# Altium PCB MotorDriver_Experimental.PcbDoc
Units mil, origin at the board's own origin, x right, y up, seen from the top; angles counter-clockwise.
Board outline 2220 x 2620 mil, 2 copper layers (Top Layer, Bottom Layer); 72 components, 43 nets, 255 pads, 79 vias.
Unrouted connection lines stored in the file: 69.
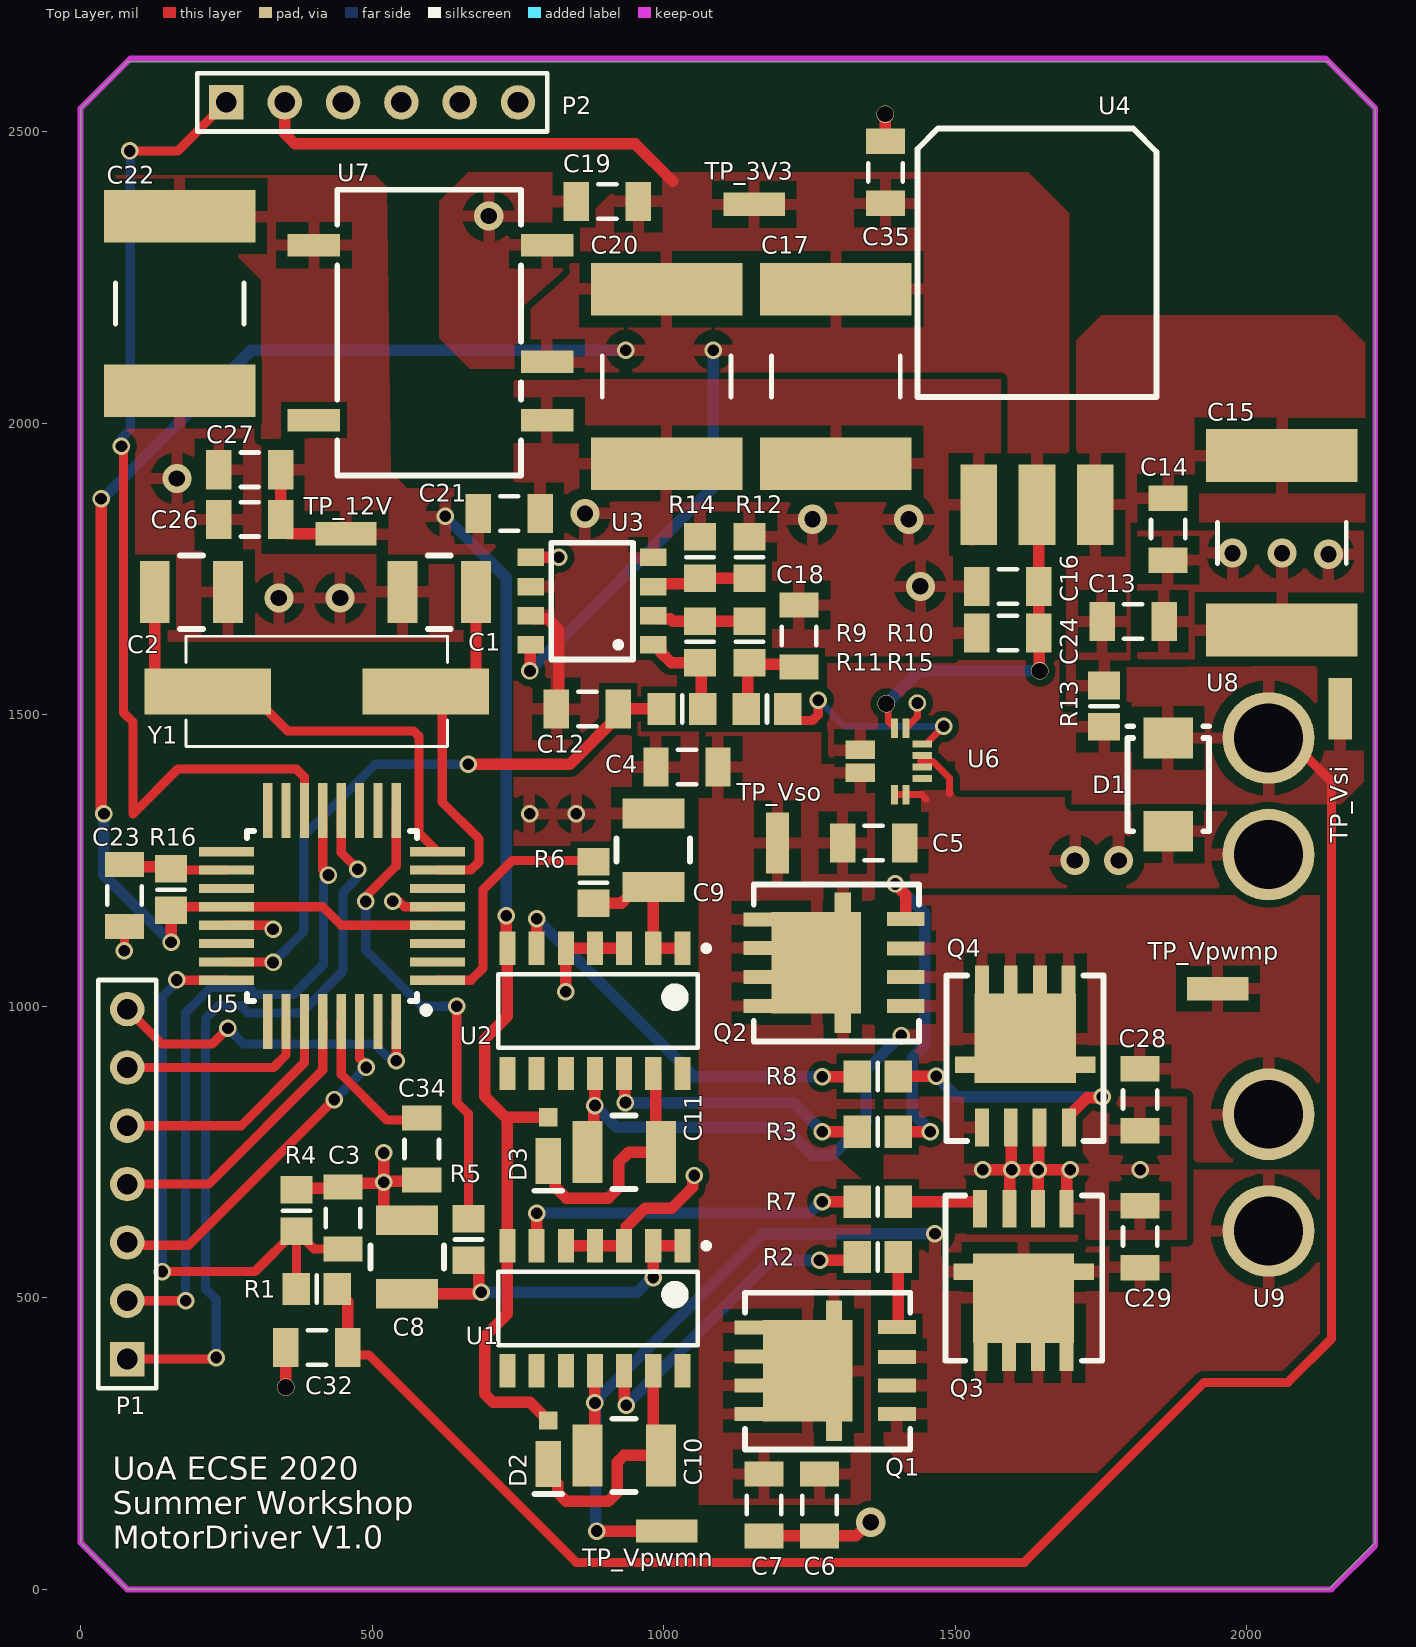
[diagram p0: Top Layer view]
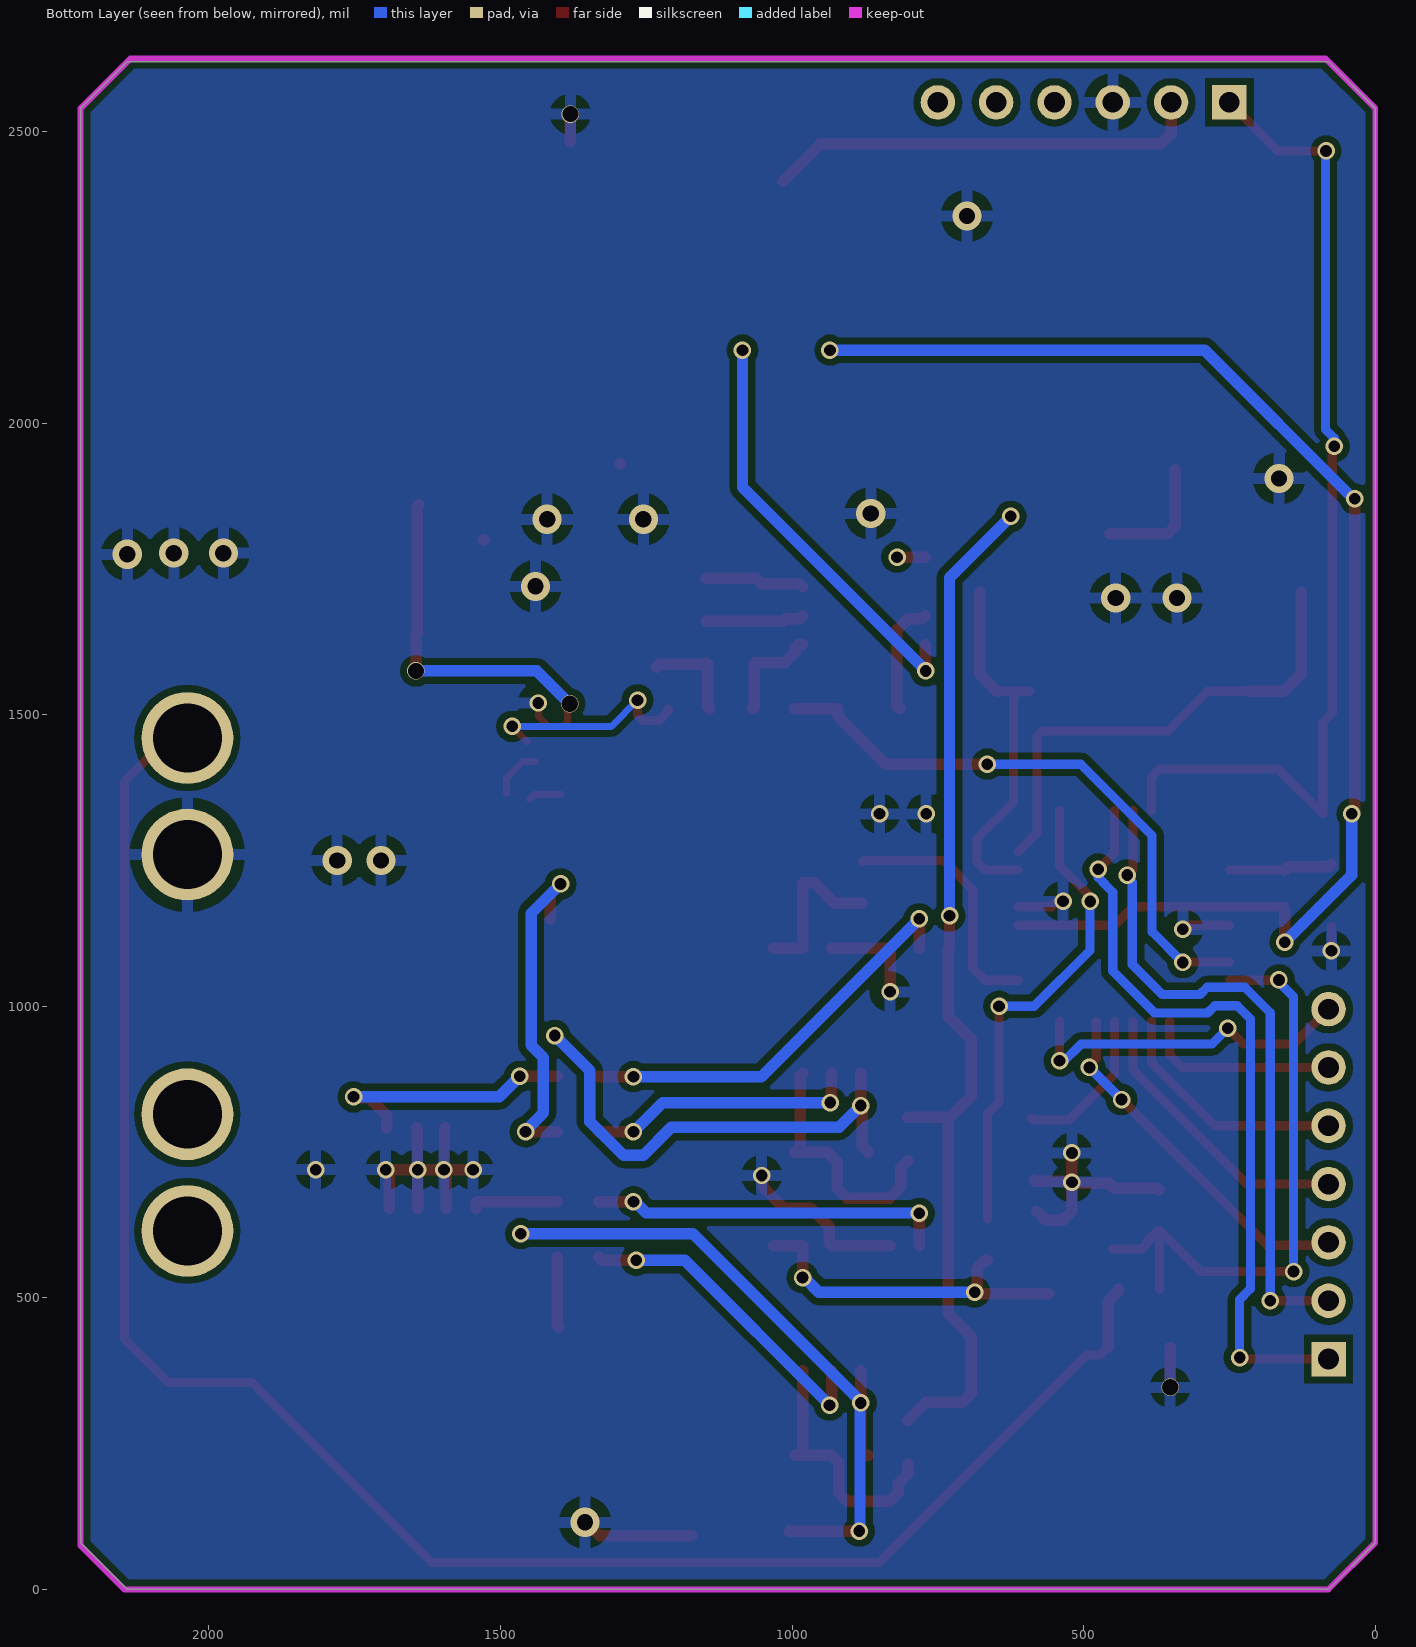
[diagram p1: Bottom Layer view, seen from below]
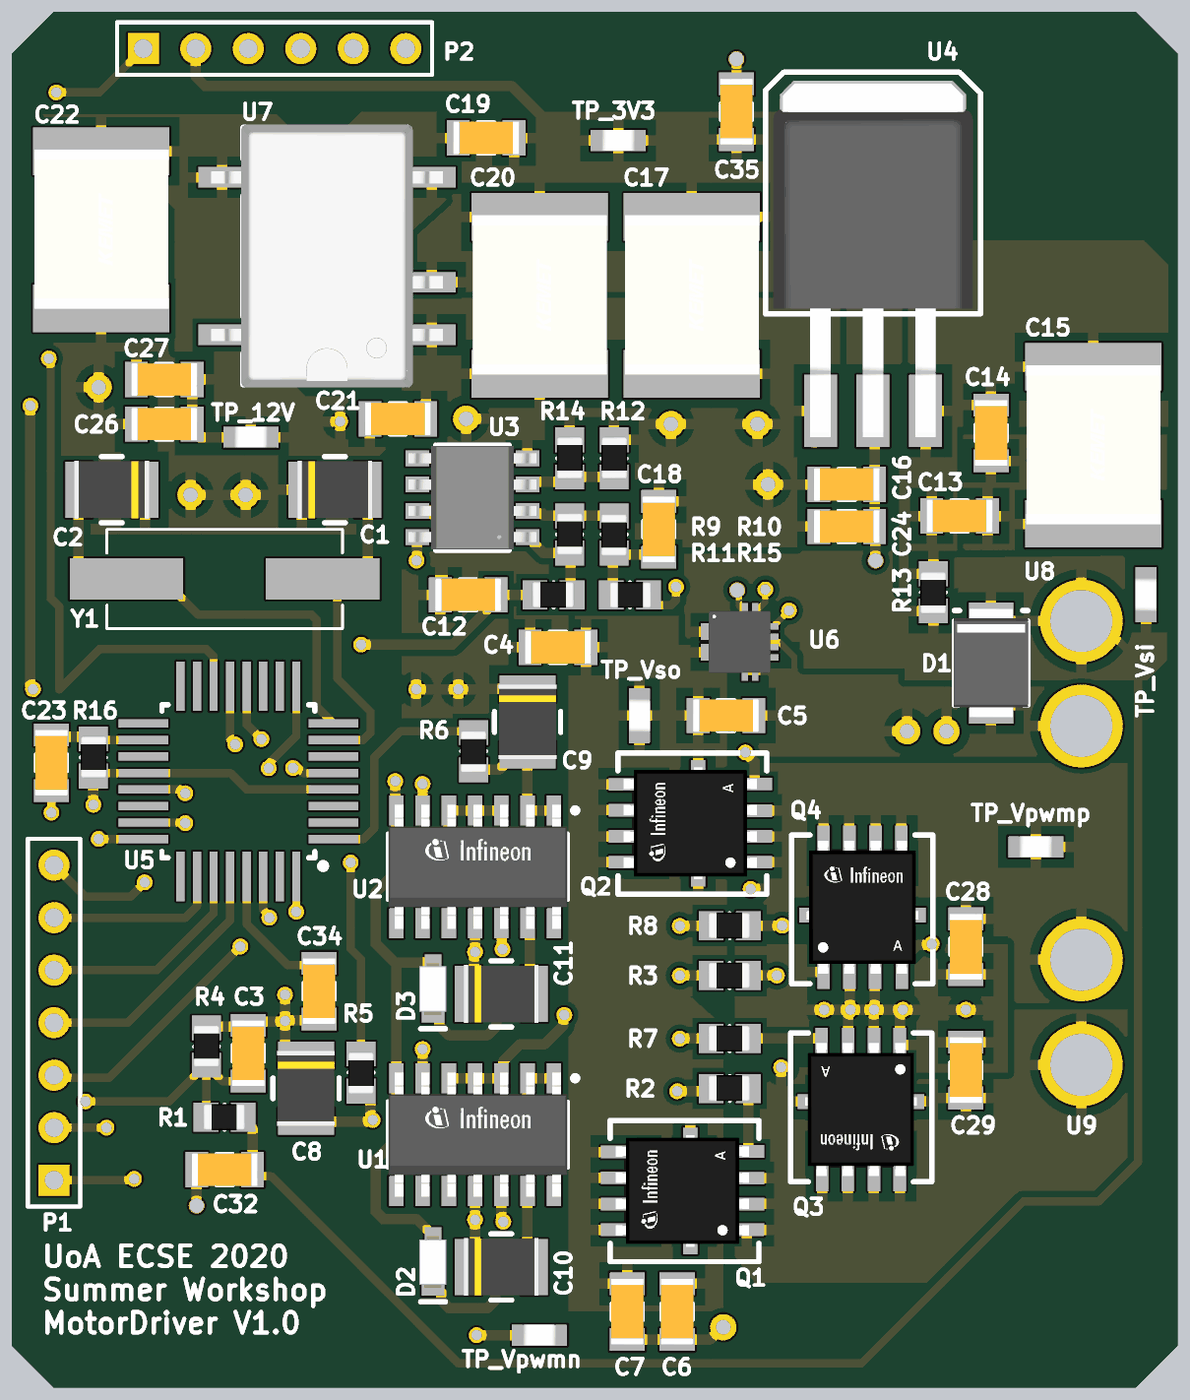
[diagram p2: 3D render of the assembled board from above, using the file's embedded part models]

## Layer stack, top to bottom
Top Solder: solder mask 0.4, Solder Resist, Dk 3.5
Top Layer: signal copper 1.4
Dielectric 1: dielectric 12.6, FR-4, Dk 4.8
Bottom Layer: signal copper 1.4
Bottom Solder: solder mask 0.4, Solder Resist, Dk 3.5

## Board outline
0,2540 80,2620 2140,2620 2220,2540 2220,80 2140,0 80,0 0,80

## Design rules (kind name [scope] priority, off if disabled: settings)
BoardOutlineClearance [All] p1: gap=10 ignorepadtopadclearanceinfootprint=FALSE except(0: Arc-SplitContinuation Track-SplitContinuation SMDPad-SplitContinuation THPad-SplitContinuation Via-SplitContinuation Fill-SplitContinuation Poly-SplitContinuation Region-SplitContinuation Text-SplitContinuation)
Clearance [All] p1: gap=11.81 ignorepadtopadclearanceinfootprint=TRUE
Height [All] p1: minheight=0 maxheight=3937.01 prefheight=500
HoleSize [All] p1: absolutevalues=TRUE maxlimit=393.7 minlimit=19.68 maxpercent=80.000 minpercent=20.000
PolygonConnect [All] p1: connectstyle=Relief reliefconductorwidth=19.68 reliefentries=4 polygonreliefangle="90 Angle" airgapwidth=19.68
RoutingVias [All] p1: holewidth=28 width=50 viastyle="Through Hole" minholewidth=28 minwidth=50 maxholewidth=28 maxwidth=50
SilkToSilkClearance [All] p1: silktosilkclearance=3.94
SilkToSolderMaskClearance [IsPad] p1: minsilkscreentomaskgap=3.94 clearancetoexposedcopper=TRUE
SolderMaskExpansion [All] p1: expansion=4 istentingtop=FALSE
Width [All] p1: maxlimit=39.37 minlimit=11.81 preferedwidth=19.68
26 further rules are at their usual default settings.

## Components (designator, comment, footprint, x,y, rotation, side; value= is the part's Value field where it differs from the comment)
C1 "Cap CER" C1210 615,1710 r0 top value=2200nF/100V
C2 "Cap CER" C1210 190,1710 r180 top value=2200nF/100V
C3 "Cap CER" C1206 450,636.85 r270 top value=100nF/100V
C4 "Cap CER" C1206 1040,1410 r0 top value=100nF/100V
C5 "Cap CER" C1206 1360,1280 r180 top value=100nF/100V
C6 "Cap CER" C1206 1267,144.74 r90 top value=100nF/100V
C7 "Cap CER" C1206 1172,144.74 r90 top value=100nF/100V
C8 "Cap CER" C1210 560,570 r270 top value=2200nF/100V
C9 "Cap CER" C1210 982,1267.73 r270 top value=2200nF/100V
C10 "Cap CER" C1210 932,229.74 r0 top value=2200nF/100V
C11 "Cap CER" C1210 932,749.74 r0 top value=2200nF/100V
C12 "Cap CER" C1206 868.85,1509.74 r0 top value=100nF/100V
C13 "CER 6.8nF" C1206 1805,1660 r180 top value=100nF/100V
C14 "CER 100nF" C1206 1865,1818.15 r90 top value=100nF/100V
C15 "FILM 10uF" LDECE4150KA0N00 2059.84,1794.61 r90 top value=1.5uF/50V
C16 "CER 100nF" C1206 1590,1720 r0 top value=100nF/100V
C17 "FILM 10uF" LDECE4150KA0N00 1295,2080 r90 top value=1.5uF/50V
C18 "Cap CER" C1206 1232,1634.74 r270 top value=100nF/100V
C19 "CER 100nF" C1206 903.15,2380 r0 top value=100nF/100V
C20 "FILM 10uF" LDECE4150KA0N00 1005,2080 r90 top value=1.5uF/50V
C21 "CER 100nF" C1206 735,1845 r180 top value=100nF/100V
C22 "FILM 2.2uF" LDECE4150KA0N00 170,2205 r90 top value=1.5uF/50V
C23 "Cap CER" C1206 75,1190 r90 top value=100nF/100V
C24 "CER 100nF" C1206 1590,1640 r0 top value=100nF/100V
C26 "CER 100nF" C1206 290,1835 r0 top value=100nF/100V
C27 "CER 100nF" C1206 290,1920 r0 top value=100nF/100V
C28 "CER 100nF" C1206 1817,839.74 r90 top value=100nF/100V
C29 "CER 100nF" C1206 1817,604.74 r270 top value=100nF/100V
C32 "CER 100nF" C1206 405,415 r0 top value=100nF/100V
C34 "CER 100nF" C1206 585,755 r90 top value=100nF/100V
C35 "Cap CER" C1206 1380,2430 r90 top value=100nF/100V
D1 "DO-214AA SMB" DO-214AA 1865,1380 r270 top
D2 "MSS1P6-M3/89A" "MicroSMP (DO-219AD)" 802,252.14 r90 top
D3 "MSS1P6-M3/89A" "MicroSMP (DO-219AD)" 802,772.14 r90 top
P1 "Header 7" HDR1X7 80,395 r90 top
P2 "Header 6" HDR1X6 250,2550 r0 top
Q1 "NMOS" BSC072N08NS5ATMA1_modified_v2 1277,374.74 r90 top
Q2 "NMOS" BSC072N08NS5ATMA1_modified_v2 1292,1074.74 r90 top
Q3 "NMOS" BSC072N08NS5ATMA1_modified_v2 1617,529.74 r180 top
Q4 "NMOS" BSC072N08NS5ATMA1_modified_v2 1620,914.74 r0 top
R1 "Resistor 0805" R0805 405,515 r0 top value=?
R2 "Resistor 0805" R0805 1367,569.74 r0 top value=?
R3 "Resistor 0805" R0805 1367,784.74 r0 top value=?
R4 "Resistor 0805" R0805 370,649.57 r270 top value=?
R5 "Resistor 0805" R0805 665,600 r90 top value=?
R6 "Resistor 0805" R0805 879.28,1212.02 r90 top value=?
R7 "Resistor 0805" R0805 1367,664.74 r0 top value=?
R8 "Resistor 0805" R0805 1367,879.74 r0 top value=?
R9 "Resistor 0805" R0805 1062,1624.74 r270 top value=?
R10 "Resistor 0805" R0805 1147,1624.74 r90 top value=?
R11 "Resistor 0805" R0805 1031.57,1509.74 r0 top value=?
R12 "Resistor 0805" R0805 1147,1769.74 r270 top value=?
R13 "Resistor 0805" R0805 1755,1514.57 r90 top value=?
R14 "Resistor 0805" R0805 1062,1769.74 r270 top value=?
R15 "Resistor 0805" R0805 1177,1509.74 r180 top value=?
R16 "Resistor 0805" R0805 155,1200 r270 top value=?
TP_3V3 "TP_3V3" TP5015 1155,2375 r180 top
TP_12V "TP_12V" TP5015 455,1810 r180 top
TP_Vpwmn "TP_Vsi" TP5015 1005,100 r180 top
TP_Vpwmp "TP_Vi_amp" TP5015 1950,1030 r180 top
TP_Vsi "TP_Vsi" TP5015 2160,1510 r270 top
TP_Vso "TP_Vso" TP5015 1195,1280 r90 top
U1 "IRS21834SPBF" SOIC127P600X175-14N 882,482.02 r270 top
U2 "IRS21834SPBF" SOIC127P600X175-14N 882,992.02 r270 top
U3 "LT6221IS8#PBF" SOIC8_NARROW 877,1694.74 r180 top
U4 "LD1086D2M" D2PAK-3L 1640,2210 r0 top
U5 "ATMega328PB" TQFP32 431.1,1154.76 r180 top
U6 "ACS70331EESATR-005U3" ACS70331_12QFN 1390,1420 r0 top
U7 "ISE0312A" ISE0312A 610,2155 r180 top
U8 "2 PIN HEADER 3MM" 3mm_holes 2037,1360 r270 top
U9 "2 PIN HEADER 3MM" 3mm_holes 2037,714.74 r270 top
Y1 "ECS-80-18-5PX-TR" XTAL_ECS-80-18-5PX-TR 405,1540 r180 top

## Footprints (in the part's own frame and the unit in brackets; to place one, negate y for a bottom-side part, rotate by r counter-clockwise, add the part's x,y. Pads: shape width x height; smd on the part's side, far side on the other; paste and mask are expansions set on the pad)
3mm_holes [mm]
  round 4 hole 3: 1(-2.54,0) 2(2.54,0)
ACS70331_12QFN [mm] "HIGH SENSITIVITY, 1 MHZ, GMR-BAS"
  rect 1.27x0.8 smd: 1(-1.35,0.5) 2(-1.35,-0.5)
  rect 0.3x0.85 smd: 5(0.15,-1.45) 6(0.65,-1.45) 11(0.65,1.45) 12(0.15,1.45)
  rect 0.85x0.3 smd: 7(1.35,-0.75) 8(1.35,-0.25) 9(1.35,0.25) 10(1.35,0.75)
  body extent -1.6,-1.5 1.4,1.5, height 0.75
BSC072N08NS5ATMA1_modified_v2 [mil]
  rect 23.94x65 smd: 1(-74,-123) 1(-25,-123) 1(24,-123) 4(75,-123) 8(-74,123) 8(-25,123) 8(25,123) 8(74,123)
  rect 65x27.87 smd: 8(-88,-15) 8(88,-15)
  rect 173.62x153.54 smd: 8(0,30.26)
  silkscreen extent -135,-146 134,138, body extent -106,-127 107,127, height 40
C1206 [mm] "Chip Capacitor, Body 3.2x1.6mm, IPC High Density"
  rect 1.1x1.7 smd: 1(-1.35,0) 2(1.35,0)
  silkscreen extent -0.4,-0.75 0.4,0.75, body extent -1.6,-0.8 1.6,0.8, height 1.5
C1210 [mm]
  rect 1.3x2.7 smd: 1(-1.6,0) 2(1.6,0)
  silkscreen extent -0.5,-1.6 0.5,1.6, body extent -1.8,-1.4 1.8,1.4, height 1.24
D2PAK-3L [mil]
  rect 63x137.8 smd: 1(100,-350) 2(0,-350) 3(-100,-350)
  silkscreen extent -205,-165 205,295, body extent -190,-400 190,279, height 200
DO-214AA [mil]
  rect 70x85 smd: 1(-80,0) 2(80,0)
  silkscreen extent -100,-70 80,70, body extent -104,-71 104,71, height 87
HDR1X6 [mm] "Connector; Header; 6 Position"
  rect 1.5x1.5 hole 0.9: 1(0,0)
  round 1.5 hole 0.9: 2(2.54,0) 3(5.08,0) 4(7.62,0) 5(10.16,0) 6(12.7,0)
  silkscreen extent -1.27,-1.27 13.97,1.27
HDR1X7 [mm] "Connector; Header; 7 Position"
  rect 1.5x1.5 hole 0.9: 1(0,0)
  round 1.5 hole 0.9: 2(2.54,0) 3(5.08,0) 4(7.62,0) 5(10.16,0) 6(12.7,0) 7(15.24,0)
  silkscreen extent -1.27,-1.27 16.51,1.27
ISE0312A [mil] "8-SMD model; 5 leads"
  rect 90x39 smd: 1(-190,150) 2(-190,50) 4(-190,-150) 5(210,-150) 8(210,150)
  silkscreen extent -145,-245 170,245, body extent -210,-250 230,250, height 285
LDECE4150KA0N00 [mm]
  rect 2.3x6.6 smd: 1(-3.8,0) 2(3.8,0)
  silkscreen extent -0.9,-2.8 0.9,2.8, body extent -3.82,-3.26 3.88,3.24, height 4.29
"MicroSMP (DO-219AD)" [mm]
  rect 0.8x0.8 smd: 1(0.95,0)
  rect 2x1.1 smd: 2(-0.95,0)
  silkscreen extent -2.25,-0.6 -2.25,0.6, body extent -1.58,-0.64 0.92,0.66, height 0.66
R0805 [mm]
  rect 1.2x1.4 smd: 1(-0.9,0) 2(0.9,0)
  silkscreen extent 0,-0.6 0,0.6, body extent -1.04,-0.63 0.99,0.64, height 0.6
SOIC8_NARROW [mil]
  rect 45x30 smd: 1(-105,75) 2(-105,25) 3(-105,-25) 4(-105,-75) 5(105,-75) 6(105,-25) 7(105,25) 8(105,75)
  silkscreen extent -70,-100 70,100, body extent -122,-98 122,99, height 69
SOIC127P600X175-14N [mm] "SOIC, 14-Leads, Body 8.65x3.90mm, Pitch 1.27mm, IPC Medium Density"
  rect 1.45x0.7 smd: 1(-2.725,3.81) 2(-2.725,2.54) 3(-2.725,1.27) 4(-2.725,0) 5(-2.725,-1.27) 6(-2.725,-2.54) 7(-2.725,-3.81) 8(2.725,-3.81) 9(2.725,-2.54) 10(2.725,-1.27) 11(2.725,0) 12(2.725,1.27) 13(2.725,2.54) 14(2.725,3.81)
  silkscreen extent -2.85,-4.22 1.6,4.97, body extent -3,-4.19 3,4.46, height 1.56
TP5015 [mil]
  rect 105x40 smd: 1(0,0)
  body extent -51,-20 51,19, height 59
TQFP32 [mm]
  rect 2.4x0.4 smd: 1(-4.6,2.8) 2(-4.6,2) 3(-4.6,1.2) 4(-4.6,0.4) 5(-4.6,-0.4) 6(-4.6,-1.2) 7(-4.6,-2) 8(-4.6,-2.8) 17(4.6,-2.8) 18(4.6,-2) 19(4.6,-1.2) 20(4.6,-0.4) 21(4.6,0.4) 22(4.6,1.2) 23(4.6,2) 24(4.6,2.8)
  rect 0.4x2.4 smd: 9(-2.8,-4.6) 10(-2,-4.6) 11(-1.2,-4.6) 12(-0.4,-4.6) 13(0.4,-4.6) 14(1.2,-4.6) 15(2,-4.6) 16(2.8,-4.6) 25(2.8,4.6) 26(2,4.6) 27(1.2,4.6) 28(0.4,4.6) 29(-0.4,4.6) 30(-1.2,4.6) 31(-2,4.6) 32(-2.8,4.6)
  silkscreen extent -4.24,-3.7 3.7,4.24, body extent -3.5,-3.5 3.5,3.5, height 1.3
XTAL_ECS-80-18-5PX-TR [mm]
  rect 5.5x2 smd: 1(-4.75,0) 2(4.75,0)
  silkscreen extent -5.7,-2.4 5.7,2.4, body extent -6.6,-2.41 6.6,2.41, height 4.32

## Part data
C1 C2 C8 C9 C10 C11: library part "Cap CER HF DC-Link CL32B225KCJSNNE", "CAP CER 2.2UF 100V X7R 1210", Manufacturer="AVX Corporation", MPN=CL32B225KCJSNNE, Supplier Part Number 1=1276-3362-1-ND, Part Description="CAP CER 2.2UF 100V X7R 1210", Supplier 1=Digi-Key, Supplier 2=Arrow, Supplier Part Number 2=CL32B225KCJSNNE, Type="Surface mount"
C3 C4 C5 C6 C7 C12 C13 C14 C16 C18 C19 C21 C23 C24 C26 C27 C28 C29 C32 C34 C35: library part "Cap CER Decoup C3216C0G2A104J160AC", "CAP CER 0.1UF 100V C0G 1206", Manufacturer="TDK Corporation", MPN=C3216C0G2A104J160AC, Supplier Part Number 1=1795799, Part Description="CAP CER 0.1UF 100V C0G 1206", Supplier 1=RSComponents, Supplier 2=Element14, Supplier 3=Digi-Key, Supplier 4=Mouser, Supplier Part Number 2=2906828, Supplier Part Number 3=445-172677-1-ND, Supplier Part Number 4=810-C3216C0G2A104J6C, Type="Surface mount"
C15 C17 C20 C22: library part "Cap Film SMD LDECE4150KA0N00", "CAP FILM 1.5UF 10% 50VDC 2824", Manufacturer=KEMET, MPN=LDECE4150KA0N00, Supplier Part Number 1=2495712, Part Description="CAP FILM 1.5UF 10% 50VDC 2824", Supplier 1=Element14, Supplier 2=RSComponents, Supplier 3=Digi-Key, Supplier 4=Mouser, Supplier Part Number 2=1650342, Supplier Part Number 3=399-12858-1-ND, Supplier Part Number 4=80-LDECE4150KA0N00, Type="Surface mount"
D1: library part SMBJ5351B-TP, "14V zener diode"
D2 D3: library part "Diode MSS1P6-M3/89A", "DIODE SCHOTTKY 60V 1A MICROSMP", Manufacturer="Vishay Semiconductor Diodes Division", Supplier Part Number 1=7103070P, MPN=MSS1P6-M3/89A, Part Description="DIODE SCHOTTKY 60V 1A MICROSMP", Supplier 1=RSComponents, Supplier 2=Element14, Supplier Part Number 2=2335157, Type="Surface mount"
P1: "Header, 7-Pin", LatestRevisionDate=17-Jul-2002, LatestRevisionNote="Re-released for DXP Platform.", Publisher="Altium Limited"
P2: "Header, 6-Pin", LatestRevisionDate=17-Jul-2002, LatestRevisionNote="Re-released for DXP Platform.", Publisher="Altium Limited"
Q1 Q2 Q3 Q4: library part "NMOS OptiMOS BSC072N08NS5ATMA1", "MOSFET N-CH 80V 74A 8TDSON", Manufacturer="Infineon Technologies", MPN=BSC072N08NS5ATMA1, Supplier Part Number 1=2725812, Part Description="MOSFET N-CH 80V 74A 8TDSON", Supplier 1=Element14, Supplier 2=Digi-Key, Supplier 3=Mouser, Supplier Part Number 2=BSC072N08NS5ATMA1CT-ND, Supplier Part Number 3=726-BSC072N08NS5ATMA, Type="Surface mount"
R1 R2 R3 R4 R5 R6 R7 R8 R9 R10 R11 R12 R13 R14 R15 R16: library part RES0805, "RES0805", MPN=?, Part Description=?, Type="Surface Mount"
TP_3V3 TP_12V TP_Vpwmn TP_Vpwmp TP_Vsi TP_Vso: library part TP_5015, "SM Test Point 5015"
U1 U2: "IC GATE DRVR HALF-BRIDGE 14SOIC"
U4: library part LD1086D2M33TR, "3.3V linear voltage regulator"
U5: "IC MCU 8BIT 32KB FLASH 32TQFP", Supplier Part Number 1=ATMEGA328PB-AU-ND, Supplier 1=Digi-Key, Supplier 2=Digikey, Supplier Part Number 2=ATMEGA328PB-AU-ND
U6: library part ACS70331_QFN, "HIGH SENSITIVITY, 1 MHZ, GMR-BAS"
U7: library part ISE0312A_8-SMD_5L, "3V-12V DC DC converter"
U8 U9: library part HEADER_2PIN, "3MM HOLES"
Y1: "8MHz Â±30ppm Crystal 18pF 60 Ohms HC-49/US", Package="HC49/US ECS International", Digi-Key_Part_Number=XC1271CT-ND, Digi-Key_Purchase_URL=https://www.digikey.com/product-detail/en/ecs-inc/ECS-80-18-5PX-TR/XC1271CT-ND/827735?utm_source=snapeda&utm_medium=aggregator&utm_campaign=symbol, MF="ECS Inc.", MP=ECS-80-18-5PX-TR, SnapEDA_Link=https://www.snapeda.com/parts/ECS-80-18-5PX-TR/ECS%20Inc./view-part/470513/?ref=snap

## Via types
v1: diameter 30, hole 20, Top Layer to Bottom Layer, 61 vias
v2: diameter 50, hole 28, Top Layer to Bottom Layer, 14 vias
v3: diameter 30, hole 28, Top Layer to Bottom Layer, 4 vias

## Nets (pads, with @x,y where several pads share a name; then routed paths per layer and width w, separated by ;. In a path a pad name is that pad's centre, name@x,y a point inside that pad or via, vN(x,y) a via of type N, cw(c..) or ccw(c..) an arc to the next point about the centre after c; other vN are vias at no path point)
3V3: C16.2 C17.2 C19.2 C20.2 C24.2 C35.1 P2.2 R16.2 TP_3V3.1 U3.8 U4.2 U5.4 U5.20 U6.12 U7.2 | length 4439.1
  Top Layer w11.81: v3(1381.46,1518.5) 1384.94,1515.02 1384.94,1488.05 U6.12@1391.5,1481.5
  Top Layer w15.75: R16.2 155,1170.51 U5.20 415.35,1170.51 446.85,1139.02 U5.4
  Top Layer w19.68: v1(35,1870) 35,1335 v1(40,1330) ; v1(155,1110) R16.2 ; P2.2 350,2496.53 367.8,2478.73 951.27,2478.73 1015,2415 ; v1(770.59,1575) 771.3,1575.7 771.3,1619.03 U3.8 ; U4.2 1643.15,1856.85 C16.2 C24.2 1644.07,1639.07 1644.07,1575.93 v3(1645,1575)
  Bottom Layer w19.68: v1(35,1870) 37.4,1870 292.4,2125 v1(935,2125) ; v1(40,1330) 40,1225 v1(155,1110) ; v1(770.59,1575) 770.59,1575.59 1085,1890 v1(1085,2125) ; v3(1381.46,1518.5) 1437.96,1575 v3(1645,1575)
12V: C21.2 C22.2 C26.2 C27.2 D2.1 D3.1 TP_12V.1 U1.7 U2.7 U7.5 | length 2013.5
  Top Layer w19.68: C27.2 C26.2 343.15,1823.19 356.34,1810 TP_12V.1 ; v1(730,1155) 730,1101.3 U2.7 732,982.78 692.63,943.41 692.63,845.59 728.68,809.54 ; D2.1 770.94,320.6 707.62,320.6 692.63,335.59 692.63,433.41 732,472.78 U1.7 732,806.22 728.68,809.54 ; D3.1 728.68,809.54
  Bottom Layer w19.68: v1(625,1840) 730,1735 v1(730,1155)
CTS_0: P1.2 U5.13 | length 1146.7
  Top Layer w15.75: P1.2 v1(180,495) ; U5.13 415.35,1234.65 v1(425,1225)
  Bottom Layer w15.75: v1(180,495) 180,988.78 223.65,1032.43 288.11,1032.43 300.54,1020 365,1020 416.5,1071.5 416.5,1212.64 425,1221.14 v1(425,1225)
D1H: R2.1 U1.12 | length 561.2
  Top Layer w19.68: U1.12 932,322.53 935.7,318.83 v1(935.7,316.03) ; v1(1267.17,564.41) 1326.24,564.41 R2.1
  Bottom Layer w19.68: v1(935.7,316.03) 1184.08,564.41 v1(1267.17,564.41)
D1L: R7.1 U1.6 | length 613.3
  Top Layer w19.68: U1.6 v1(782,644.74) ; v1(1272,664.74) R7.1
  Bottom Layer w19.68: v1(782,644.74) 782.7,645.43 1249.91,645.43 1269.21,664.74 v1(1272,664.74)
D2H: R3.1 U2.12 | length 469.3
  Top Layer w19.68: U2.12 933.12,883.61 933.12,836.02 v1(934.25,834.89) ; v1(1272,784.74) R3.1 R3.1@1331.27,784.44
  Bottom Layer w19.68: v1(934.25,834.89) 1221.84,834.89 v1(1272,784.74)
D2L: R8.1 U2.6 | length 712.3
  Top Layer w19.68: U2.6 v1(782,1149.74) ; v1(1272,879.15) 1272.3,879.44 1331.27,879.44 R8.1
  Bottom Layer w19.68: v1(782,1149.74) 1052.59,879.15 v1(1272,879.15)
DIR_SIG: P1.4 U5.28 | length 499.5
  Top Layer w15.75: P1.4 219.81,695 415.35,890.54 U5.28
GND: C1.1 C2.1 C3.1 C4.1 C5.1 C6.1 C7.1 C8.1 C9.1 C12.1 C13.1 C14.1 C15.1 C16.1 C17.1 C18.1 C19.1 C20.1 C21.1 C22.1 C23.1 C24.1 C26.1 C27.1 C28.1 C29.1 C32.1 C34.1 C35.2 D1.2 P2.3 Q3.1 Q4.1 R4.1 R12.1 R14.1 U1.3 U1.4 U1.5 U2.3 U2.4 U2.5 U3.4 U3.6 U3.7 U4.3 U5.5 U5.21 U6.5 U6.6 U6.8 U6.9 U6.11 U7.1 U7.4 U8.2 | length 2269.8
  Top Layer w11.81: U6.5 U6.6 1442.09,1362.91 1450,1355 ; U6.11@1419.53,1481.02 1435,1496.5 v1(1435,1520) ; 1440,1420 1461.31,1420 1490,1391.31 1490,1365
  Top Layer w15.75: v1(75,1095) C23.1 ; U5.21 322.87,1139.02 v1(330,1131.89) ; v1(535.34,1180) 545.69,1180 555.18,1170.51 568.22,1170.51 U5.5
  Top Layer w19.68: v3@351.25,346.25 v3(351.55,346.55) 351.55,414.7 C32.1 ; R4.1 372.5,687.5 447.5,687.5 C3.1 456.45,696.45 518.03,696.45 v1(520,698.43) ; v1(520,748.43) v1(520,698.43) ; C8.1@580,648.74 564.25,632.99 C8.1 535.75,632.99 520,648.74 v1(520,698.43) ; C34.1 583.29,700.14 521.71,700.14 v1(520,698.43) ; U3.7 777.16,1664.58 800.85,1664.58 820.09,1645.34 820.09,1514.13 C12.1 ; U1.5 U1.4 U1.3 935.94,593.24 935.94,621.75 968.05,653.87 1014.06,653.87 1050.03,689.84 1050.03,707.76 v1(1052,709.74) ; v1(832,1024.74) U2.5 U2.4 U2.3 ; C7.1 C6.1 1329.47,91.59 1352.88,115 v2(1355,115) ; C17.1@1295,1930 C17.1 ; C35.2 v3(1380,2530) ; U4.3@1526.85,1800 U4.3@1530,1800 ; v1(1547,719.74) v1@1596,719.74 ; Q3.1@1593,652.74 1593,712.94 1597,716.94 1596,717.94 v1@1596,719.74 ; Q4.1@1595,791.74 1596,790.74 v1@1596,719.74 ; Q3.1@1642,652.74 v1(1642,719.74) ; Q4.1@1644,791.74 1643,790.74 1643,720.74 v1(1642,719.74) ; Q3.1@1691,652.74 1691,710.94 1697,716.94 1694.21,719.74 v1(1642,719.74) ; v1@1596,719.74 v1(1597,719.74) v1(1642,719.74)
  other v1: 1697,719.74 1817,719.74 770,1330 850,1330
  other v2: 1705,1250 1780,1250 340,1700 445,1700 1440,1720 2140,1775 1975.26,1777 2060.26,1777 1255,1835 1420,1835 865,1845 165,1905 700,2355
HIN1: C8.2 R5.1 U1.1 U1.2 | length 603
  Top Layer w19.68: C8.2 681.48,507.01 685.03,510.55 685.03,514.5 682.72,516.81 682.72,550.79 668.94,564.57 R5.1 ; v1@685.6,511.13 v1(687,509.74) ; v1(982,534.74) U1.2 U1.1
  Bottom Layer w19.68: v1(687,509.74) 954.21,509.74 979.21,534.74 v1(982,534.74)
HIN2: C9.2 R6.1 U2.1 U2.2 | length 279.3
  Top Layer w19.68: R6.1 927.16,1176.59 938.69,1188.12 938.69,1188.99 961.72,1212.02 979.72,1212.02 982,1209.74 C9.2 U2.2 U2.1
NetC23_2: C23.2 R16.1 U5.18 | length 179
  Top Layer w15.75: R16.1@155,1233.5 U5.18
  Top Layer w19.68: C23.2 78.86,1239.29 149.21,1239.29 R16.1@155,1233.5
NetQ1_4: Q1.4 R2.2 | length 121.2
  Top Layer w19.68: Q1.4 1400.31,449.74 1402.43,451.86 R2.2
NetQ2_4: Q2.4 R3.2 | length 589.4
  Top Layer w19.68: v1(1397,1209.74) 1397,1209.23 1415,1191.23 Q2.4 ; R3.2 v1(1457,784.74)
  Bottom Layer w19.68: v1(1397,1209.74) 1447.59,1159.15 1447.59,932.92 1426.41,911.74 1426.41,817.12 1457,786.53 v1(1457,784.74)
NetQ3_4: Q3.4 R7.2 | length 150.3
  Top Layer w19.68: R7.2 1539.87,664.74 1542,662.61 Q3.4
NetQ4_4: Q4.4 R8.2 | length 455
  Top Layer w19.68: R8.2 v1(1467,879.74) ; Q4.4 1695,812.27 1725.49,842.76 1750.03,842.76 v1(1752,844.74)
  Bottom Layer w19.68: v1(1467,879.74) 1502,844.74 v1(1752,844.74)
NetR9_1: R9.1 R10.2 U3.2 | length 169
  Top Layer w19.68: U3.2 987.16,1664.58 1010.85,1664.58 1015.26,1660.17 R9.1 R10.2
NetR9_2: R9.2 R11.2 U3.1 | length 178.6
  Top Layer w19.68: U3.1 989.5,1619.74 994.66,1614.58 994.66,1607.08 1012.43,1589.3 R9.2 1064.5,1586.8 1064.5,1512.24 R11.2
NetR12_2: R12.2 R14.2 U3.3 | length 171
  Top Layer w19.68: U3.3 987.16,1724.89 1052.59,1724.89 R14.2 R12.2
NetR15_1: R15.1 U6.10 | length 363.3
  Top Layer w11.81: U6.10@1453.46,1453.46 v1(1480,1480)
  Top Layer w15.75: R15.1 1212.43,1505.8 1228.18,1490.05 1255.06,1490.05 1265,1499.99 v1(1265,1525)
  Bottom Layer w11.81: v1(1265,1525) 1310,1480 v1(1480,1480)
NetU3_1: U3.5 | length 48.3
  Top Layer w19.68: U3.5 820,1769.74 v1(820,1770)
PWM_L: R5.2 U5.9 | length 830.2
  Top Layer w15.75: v1(488.93,1179.69) 488.93,1188.21 541.34,1240.61 U5.9 ; v1(645,1000) 645,835.59 665,815.59 R5.2
  Bottom Layer w15.75: v1(488.93,1179.69) 488.93,1096.07 585,1000 v1(645,1000)
PWM_R: R6.2 U5.1 | length 432.2
  Top Layer w15.75: U5.1 669.23,1044.53 690,1065.29 690,1200 740,1250 876.74,1250 R6.2
RST: C34.2 U5.29 | length 267.3
  Top Layer w15.75: U5.29 446.85,883.15 525,805 586.85,805 C34.2@590,808.15
RTS_0: P1.1 U5.12 | length 1319.7
  Top Layer w15.75: P1.1 230,395 v1(232.5,397.5) ; U5.12 446.85,1291.88 446.85,1263.15 v1(475,1235)
  Bottom Layer w15.75: v1(232.5,397.5) 232.5,497.12 214.07,515.55 214.07,978.31 236.69,1000.93 275.06,1000.93 287.49,988.5 378.05,988.5 450,1060.46 450,1195.38 463.62,1209 463.62,1209.62 475,1221 v1(475,1235)
RX_0: P1.3 U5.30 | length 619.8
  Top Layer w15.75: P1.3@80,590 185,590 v1(435,840) ; U5.30 478.35,910.51 490,898.86 v1(490,895)
  Bottom Layer w15.75: v1(435,840) v1(490,895)
S1H: C10.1 C29.2 Q1.1 Q3.8 TP_Vpwmn.1 U1.11 U9.2 | length 1204.1
  Top Layer w19.68: C10.1 882,229.74 v1(882,319.74) U1.11 ; v1(885,100) 1003.5,100 1004.25,100.75 TP_Vpwmn.1
  Bottom Layer w19.68: v1(885,100) 883.5,101.5 883.5,318.24 v1(882,319.74) 882,322 1170,610 v1(1465,610)
S2H: C11.1 C28.2 Q2.1 Q4.8 TP_Vpwmp.1 U2.11 U9.1 | length 837.2
  Top Layer w19.68: C11.1 880.03,760.75 880.03,827.76 v1(882,829.74) U2.11
  Bottom Layer w19.68: v1(882,829.74) 919.4,792.33 1207,792.33 1255.19,744.15 1288.81,744.15 1346.92,802.25 1346.92,889.66 v1(1407,949.74)
Spd_Sig0: P1.6 U5.26 | length 338.4
  Top Layer w15.75: P1.6 330.73,895 352.36,916.63 U5.26
Spd_Sig1: P1.5 U5.27 | length 418.9
  Top Layer w15.75: P1.5 275.27,795 383.86,903.59 U5.27
ST_INT: P1.7 U5.32 | length 588
  Top Layer w15.75: P1.7 140,935 225.38,935 v1(252.69,962.31) ; v1(541.34,906.34) U5.32
  Bottom Layer w15.75: v1(252.69,962.31) 280,935 504.62,935 533.28,906.34 v1(541.34,906.34)
TX_0: U5.31
VB1: C10.2 D2.2 U1.13 | length 446.9
  Top Layer w19.68: D2.2 802,197.02 817.83,181.19 817.83,165.99 832.82,151 905.2,151 920.19,165.99 920.19,218.2 931.72,229.74 C10.2@982,229.74 ; U1.13 C10.2@982,229.74 ; C10.2 C10.2@982,229.74
VB2: C11.2 D3.2 U2.13 | length 437.5
  Top Layer w19.68: D3.2 813.81,722.93 813.81,690 832.82,671 905.2,671 922.54,688.33 922.54,732.4 939.87,749.74 C11.2 985.94,758.79 985.94,880.8 U2.13
Vi: C18.2 R10.1 R15.2 | length 166.2
  Top Layer w19.68: R15.2 1144.28,1512.45 R10.1@1144.28,1586.59 ; R10.1 1149.72,1586.59 1227,1586.59 C18.2
Vi_amp: C12.2 R11.1 U5.23 | length 1030.2
  Top Layer w15.75: U5.23 328.98,1076.02 v1(330,1075)
  Top Layer w19.68: v1(665,1415) 839.07,1415 922,1497.93 C12.2 R11.1
  Bottom Layer w15.75: v1(330,1075) 382.63,1127.63 382.63,1292.63 505,1415 v1(665,1415)
Vin: C32.2 D1.1 R1.2 R13.1 TP_Vsi.1 U6.1 U8.1 | length 3213.4
  Top Layer w15.75: R1.2 R1.2@450,505.43 ; C32.2 470.97,402.18 494.2,402.18 850.07,46.31 1618.16,46.31 1926.84,355 2070,355 2145,430 2145,1385 2070,1460 U8.1
  Top Layer w19.68: R1.2 440.43,511.06 458.15,493.35 C32.2
VinFILT: C13.2 C14.2 C15.2 R13.2 U4.1
Vs: C3.2 R1.1 R4.2 U5.24 | length 1049.1
  Top Layer w15.75: v1(140,545) 299.13,545 369.13,615 R4.2 ; v1(165,1045) 165.47,1044.53 U5.24 ; R1.1 370,515.43 R4.2 ; C3.2 400.43,583.7 389.69,594.45 389.69,598.39 373.94,614.13 R4.2
  Bottom Layer w15.75: v1(140,545) 140,1016.14 165,1041.14 v1(165,1045)
Vso: C4.2 C5.2 C6.2 C7.2 Q1.8 Q2.8 TP_Vso.1 U6.2
Wout: P2.1 U5.14 | length 1738.1
  Top Layer w15.75: v1(70,1960) 73.62,1956.38 73.62,1503.33 90,1486.95 90,1330 166.73,1406.73 370.02,1406.73 383.86,1392.89 U5.14 ; v1(84.36,2466.64) 166.64,2466.64 P2.1
  Bottom Layer w15.75: v1(70,1960) 70,1973.86 85,1988.86 v1@85,2465
X1: C1.2 U5.7 Y1.1 | length 637.8
  Top Layer w15.75: Y1.1 Y1.1@610.91,1540 ; U5.7 651.58,1233.5 669.23,1233.5 683.07,1247.34 683.07,1286.93 620,1350 620,1530.91 Y1.1@610.91,1540 ; Y1.1@648.46,1540 Y1.1@610.91,1540
  Top Layer w19.68: Y1.1@648.46,1540 654.68,1546.22 677.99,1569.53 C1.2
X2: C2.2 U5.8 Y1.2 | length 848.9
  Top Layer w15.75: Y1.2 286.89,1540 354.75,1472.14 570.78,1472.14 580,1462.91 580,1297.2 U5.8
  Top Layer w19.68: C2.2 127.01,1569.53 156.54,1540 Y1.2
pads on no net: P2.4 P2.5 P2.6 U1.8 U1.9 U1.10 U1.14 U2.8 U2.9 U2.10 U2.14 U5.2 U5.3 U5.6 U5.10 U5.11 U5.15 U5.16 U5.17 U5.19 U5.22 U5.25 U6.7 U7.8

## Polygon pours and split planes (outlines as drawn)
S1H on Top Layer "S1H_L01_P008" (solid, remove dead copper, pour order 8): 1895,610 1895,720 2130,720 2130,199.74 1415,199.74 1377,250 1377,610
Vin on Top Layer "VIN_L01_P024" (solid, remove dead copper, pour order 24): 1280,1593.31 1707.76,1593.31 1707.76,1580 2200,1585.05 2200,1385 2161.77,1346.77 1700,1346.77 1700,1370 1505,1370 1500,1375 1500,1420 1280,1420
S2H on Top Layer "S2H_L01_P007" (solid, remove dead copper, pour order 7): 1377,1190 1377,859.74 1897,859.74 1897,1190
GND on Top Layer "GND_L01_P002" (solid, remove dead copper, pour order 2): 1377,844.74 1377,599.74 1897,599.74 1897,844.74
GND on Top Layer "GND_L01_P004" (solid, remove dead copper, pour order 4): 742.5,1635 742.5,1275 1060,1275 1060,1600 1580,1600 1580,1765 1577.5,1765 1577.5,2075 742.5,2075
Vso on Top Layer "VSO_L01_P009" (solid, remove dead copper, pour order 9): 1060,1365 1060,1470 1270,1470 1270,1415 1362,1415 1362,1365 1362,745 1060,745
3V3 on Top Layer "3V3_L01_P016" (solid, remove dead copper, pour order 16): 1695,1763.43 1695,2359.74 1624.74,2430 945.79,2430 745.79,2230 745.79,1755.18
12V on Top Layer "12V_L01_P022" (solid, remove dead copper, pour order 22): 55.05,2425.05 30,2400 30,2310 55,2285 270,2285 310,2245 310,1770 695,1770 729.74,1804.74 729.74,1863.26 705,1888 560,1888 531.5,1916.5 525,2405 504.95,2425.05
S2H on Top Layer "S2H_L01_P013" (solid, remove dead copper, pour order 13): 1897,1190 1897,719.74 2045.26,719.74 2187,870.02 2187,1190
VinFILT on Top Layer "VINFILT_L01_P017" (solid, remove dead copper, pour order 17): 1690,2125 1750,2185 2155,2185 2205,2135 2205,1830 1800,1830 1800,1515 1690,1515
Vso on Top Layer "VSO_L01_P010" (solid, remove dead copper, pour order 10): 1060,745 1060,145 1355,145 1355,689.42 1292.2,745
GND on Top Layer "GND_L01_P025" (solid, remove dead copper, pour order 25): 1370,1370 1370,1190 1945,1190 1990,1145 2040,1145 2030,1370
GND on Top Layer "GND_L01_P026" (solid, remove dead copper, pour order 26): 30,2120 30,1625 725,1625 725,1775 310,1775 310,2120
GND on Top Layer "GND_L01_P001" (solid, remove dead copper, pour order 1): 614.74,2380 614.74,2145.26 667,2093 759.74,2093 759.74,2201.14 900,2325.45 900,2430 664.74,2430
GND on Top Layer "GND_L01_P019" (solid, remove dead copper, pour order 19): 1794.74,1815 2200,1815 2200,1595 1794.74,1595
no net on Top Layer "NONET_L01_P023" (solid, remove dead copper, pour order 23): 4350,3140 4350,2745
GND on Bottom Layer "GND_L02_P011" (solid, remove dead copper, pour order 11): -97.11,2718.52 -97.11,-70 2265,-70 2265,2718.52

## Keep-outs
Keep-Out Layer:
  lines w10: 0,80 80,0 2145,0 2220,75 2220,2540 2135,2625 85,2625 0,2540 0,80

## Other copper
Top Layer:
  text "Rules: / Try to keep 0.5mm (19.685 mil) clearance / 0.4mm (15.748 mil) needed for some SMT pads / 0.3mm (11.811 mil) needed for QFM" at 2670,1982.25 h40
  text "Notes: / QFM current sensor is a BIG bottleneck in layout and current flow. Sadly unavoidable? /  / Not happy with MCU placement and Vin sensor, but space limitations require it? It leaves Vin very vulnerable to noise! However, no room for traverse on bottom layer. /  / Space limitations sadly mean board must be very compact. How will we mount? Leave vias for bolts? Worst case we can just tap holes once PCB manufactured." at 2665,445 h60

## Silkscreen, mask and mechanical layers (free items; w line width, h text height)
Top Overlay:
  text "UoA ECSE 2020 / Summer Workshop / MotorDriver V1.0" at 55,70 h39.37
Top Solder:
  text "UoA ECSE 2020 / Summer Workshop / MotorDriver V1.0" at 55,70 h39.37